# Altium PCB BMS.PcbDoc
Units mm, origin at the board's own origin, x right, y up, seen from the top; angles counter-clockwise.
Board outline 55.88 x 38.1 mm, 2 copper layers (Top Layer, Bottom Layer); 54 components, 35 nets, 178 pads, 4 vias.
Unrouted connection lines stored in the file: 59.
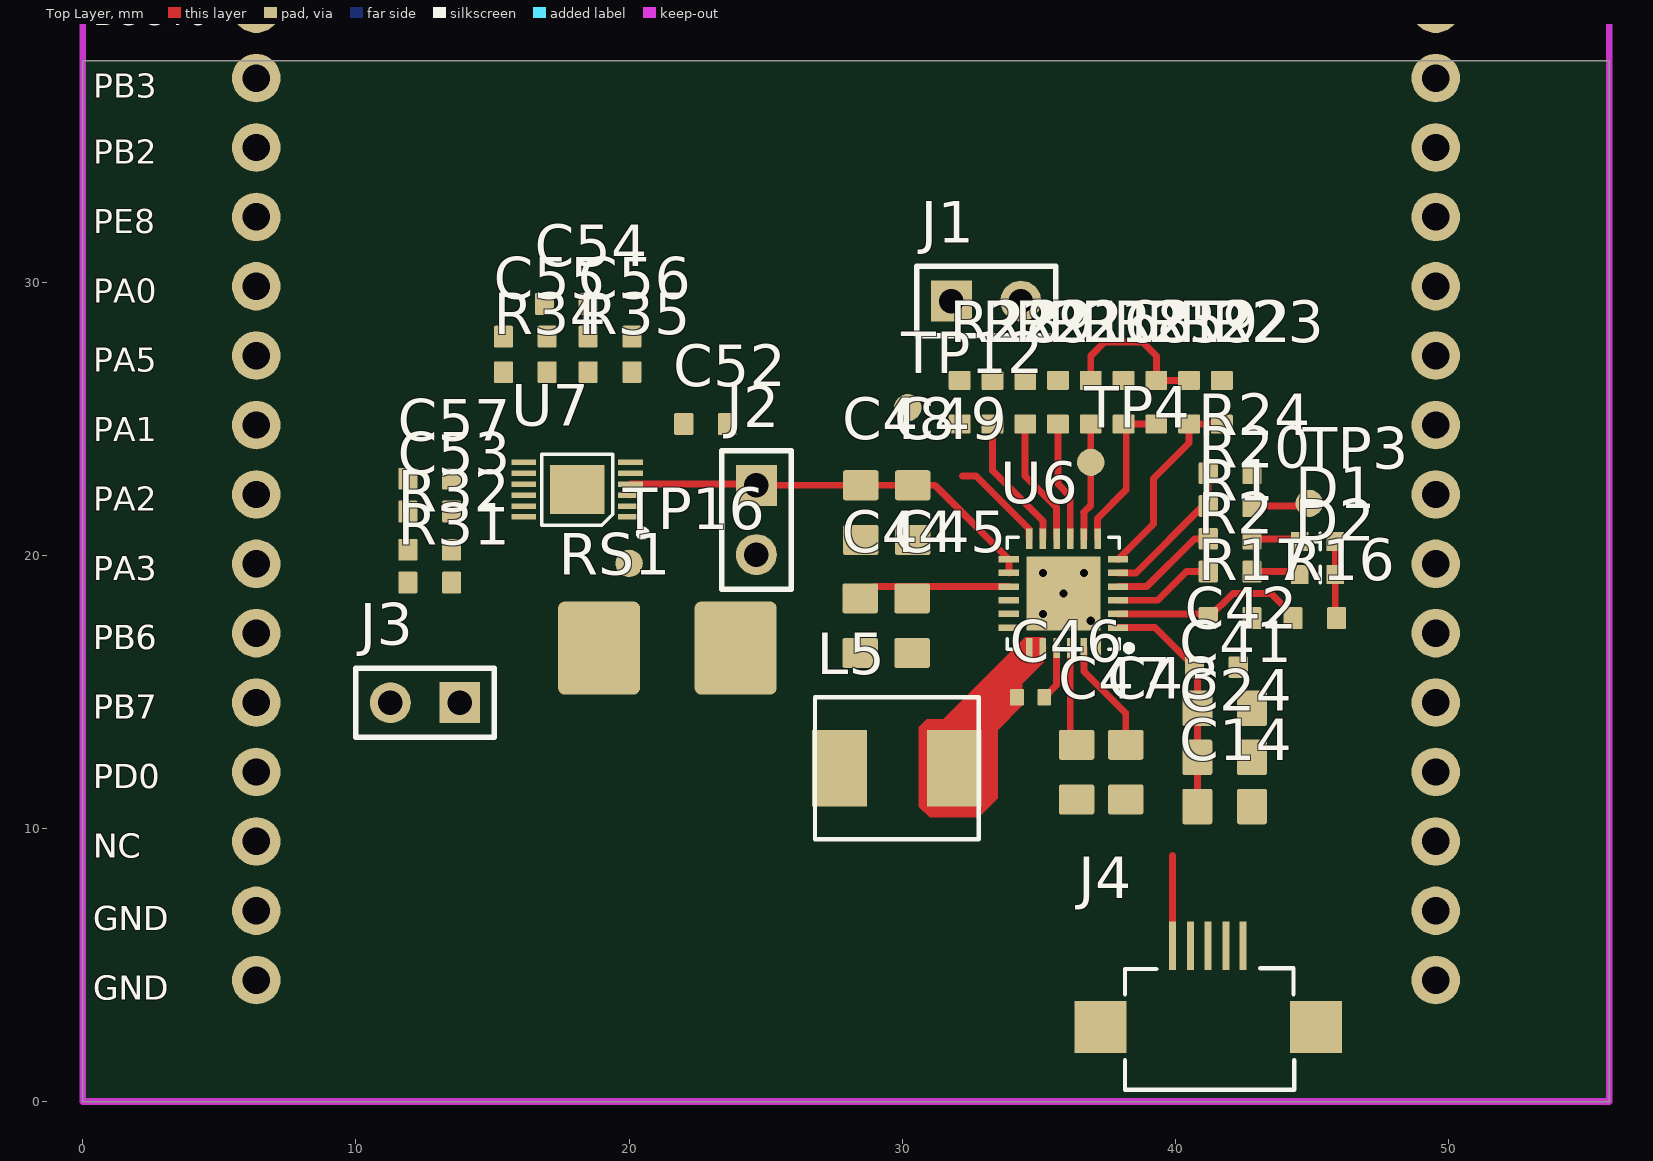
[diagram p0: Top Layer view]
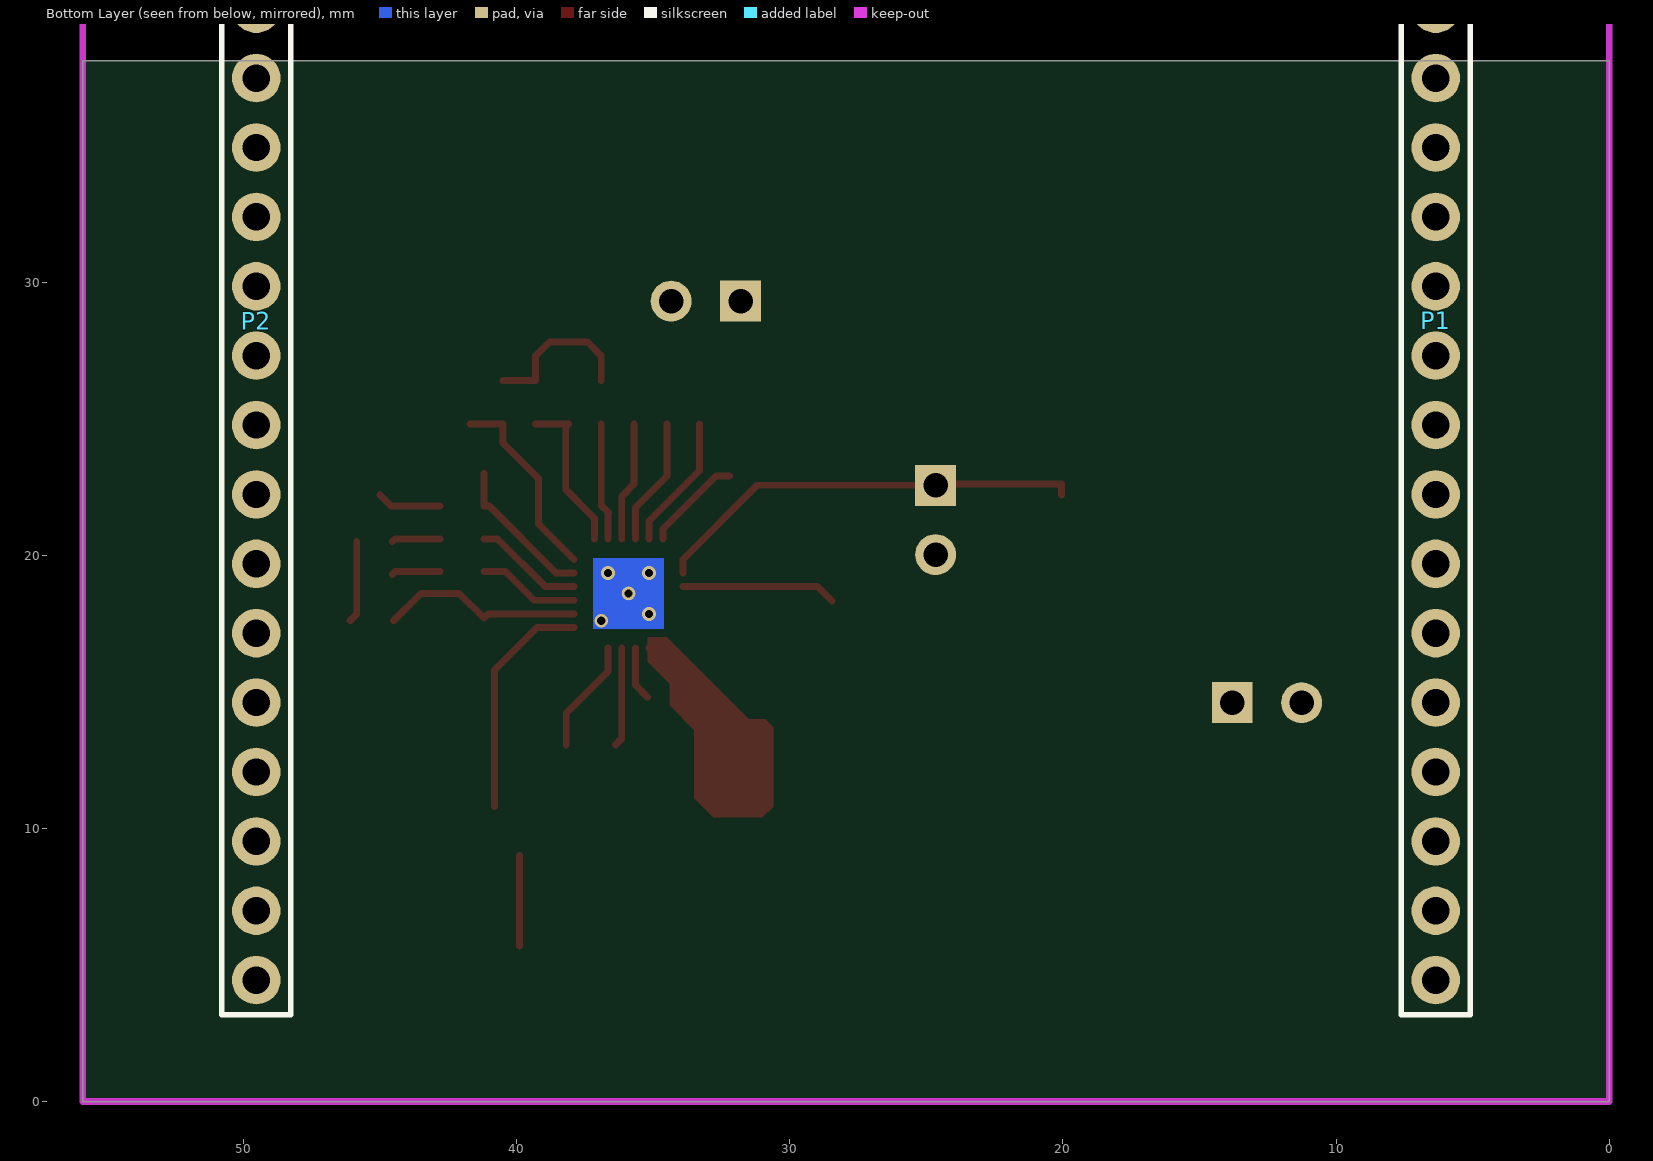
[diagram p1: Bottom Layer view, seen from below]

## Layer stack, top to bottom
Top Solder: solder mask 0.0102, Solder Resist, Dk 3.5
Top Layer: signal copper 0.0356
Dielectric 1: dielectric 0.32, FR-4, Dk 4.8
Bottom Layer: signal copper 0.0356
Bottom Solder: solder mask 0.0102, Solder Resist, Dk 3.5

## Board outline
0,0 55.88,0 55.88,38.1 0,38.1

## Design rules (kind name [scope] priority, off if disabled: settings)
Clearance [All] p1: gap=0.2 ignorepadtopadclearanceinfootprint=FALSE
PolygonConnect [All] p1: connectstyle=Relief reliefconductorwidth=0.254 reliefentries=4 polygonreliefangle="90 Angle" airgapwidth=0.254
RoutingVias [All] p1: holewidth=0.711 width=1.27 viastyle="Through Hole" minholewidth=0.711 minwidth=1.27 maxholewidth=0.711 maxwidth=1.27
SolderMaskExpansion [All] p1: expansion=0.102
Width [All] p1: maxlimit=0.254 minlimit=0.254 preferedwidth=0.254
30 further rules are at their usual default settings.

## Components (designator, comment, footprint, x,y, rotation, side; value= is the part's Value field where it differs from the comment)
C14 "TMK212BBJ106KG-T" C0805 41.8,10.8 r180 top
C24 "TMK212BBJ106KG-T" C0805 41.8,12.6 r180 top
C41 "TMK212BBJ106KG-T" C0805 41.8,14.4 r180 top
C42 "0603B104K500CT" C0603 41.5,15.9 r180 top
C43 "TMK212BBJ106KG-T" C0805 38.18,12.06 r90 top
C44 "TMK212BBJ106KG-T" C0805 28.46,17.42 r90 top
C45 "TMK212BBJ106KG-T" C0805 30.36,17.42 r90 top
C46 "GRM155R71C473KA01D" C0402 34.7,14.8 r180 top
C47 "TMK212BBJ106KG-T" C0805 36.38,12.06 r90 top
C48 "TMK212BBJ106KG-T" C0805 28.48,21.56 r90 top
C49 "TMK212BBJ106KG-T" C0805 30.38,21.56 r90 top
C52 "CL10A475KQ8NNNC" C0603 22.8,24.8 r0 top
C53 "0603B104K500CT" C0603 12.7,21.6 r0 top
C54 "0603B104K500CT" C0603 17.7,29.2 r180 top
C55 "0603B104K500CT" C0603 16.2,28 r180 top
C56 "0603B104K500CT" C0603 19.3,28 r180 top
C57 "0603B104K500CT" C0603 12.7,22.8 r180 top
D1 "LED_WHITE_0603" LED_BLUE_0603_TOP 45.2,20.5 r180 top
D2 "LED_BLUE_0603" LED_BLUE_0603_TOP 45.2,19.3 r180 top
J1 "HDR1x2" HDR1x2 31.8,29.3 r0 top
J2 "HDR1x2" HDR1x2 24.66,22.56 r270 top
J3 "HDR1x2" HDR1x2 13.8,14.6 r180 top
J4 "microUSB" MICRO_USB_SMD 41.2,5.7 r180 top
L5 "SRP5020TA-2R2M" SRP5020TA 29.8,12.2 r180 top
P1 "Comment" "HDR1X20 (Primary)" 6.35,52.705 r270 bottom
P2 "Comment" "HDR1X20 (Primary)" 49.53,52.705 r270 bottom
R1 "WR06X222 JTL" R0603 42,20.6 r0 top
R2 "WR06X222 JTL" R0603 42,19.4 r0 top
R16 "WR06X000 PTL" R0603 45.1,17.7 r180 top
R17 "WR06X000 PTL" R0603 42,17.7 r0 top
R18 "WR06X103 JTL" R0603 36.9,25.6 r270 top
R19 "WR06X103 JTL" R0603 39.3,25.6 r270 top
R20 "WR06X103 JTL" R0603 42,21.8 r180 top
R21 "RC0603FR-07100RL" R0603 34.5,25.6 r90 top
R22 "WR06X103 JTL" R0603 40.5,25.6 r270 top
R23 "WR06X000 PTL" R0603 41.7,25.6 r90 top
R24 "WR06X000 PTL" R0603 42,23 r0 top
R25 "WR06X000 PTL" R0603 38.1,25.6 r90 top
R26 "WR06X000 PTL" R0603 35.7,25.6 r270 top
R28 "WR06X103 JTL" R0603 32.1,25.6 r270 top
R29 "WR06X103 JTL" R0603 33.3,25.6 r90 top
R31 "WR06X000 PTL" R0603 12.7,19 r0 top
R32 "WR06X000 PTL" R0603 12.7,20.2 r0 top
R34 "RC0603FR-0749R9L" R0603 16.2,26.7 r180 top
R35 "RC0603FR-0749R9L" R0603 19.3,26.7 r0 top
RS1 "PA2512FKF7W0R001E" R2512L 21.4,16.6 r180 top
TP3 "TestPoint" TESTPOINT 44.9,21.9 r90 top
TP4 "TestPoint" TESTPOINT 36.9,23.4 r0 top
TP9 "TestPoint" TESTPOINT 151.34,22.44 r90 top
TP12 "TestPoint" TESTPOINT 30.2,25.4 r270 top
TP15 "TestPoint" TESTPOINT 98,22.44 r90 top
TP16 "TestPoint" TESTPOINT 20,19.7 r90 top
U6 "BQ25892" QFN24-4x4x0.8-0.5 35.9,18.6 r180 top
U7 "BQ27542-G1" BQ27542DRZR-G1 18.1,22.4 r180 top

## Footprints (in the part's own frame and the unit in brackets; to place one, negate y for a bottom-side part, rotate by r counter-clockwise, add the part's x,y. Pads: shape width x height; smd on the part's side, far side on the other; paste and mask are expansions set on the pad)
BQ27542DRZR-G1 [mm]
  rect 0.9x0.2 smd: 1(-1.95,1) 2(-1.95,0.6) 3(-1.95,0.2) 4(-1.95,-0.2) 5(-1.95,-0.6) 6(-1.95,-1) 7(1.95,-1) 8(1.95,-0.6) 9(1.95,-0.2) 10(1.95,0.2) 11(1.95,0.6) 12(1.95,1)
  rect 2x1.8 smd paste-0.2: 13(0,0)
  silkscreen extent -2.53,-1.3 1.3,1.72, body extent -2.05,-1.25 2.05,1.25, height 1
C0402 [mm] "CAP 0402 SMT 1x0.5x0.5 mm"
  rrect15% 0.5x0.6 smd paste-2 mask+0: 1(-0.5,0) 2(0.5,0)
  body extent -0.5,-0.25 0.5,0.25, height 0.56
C0603 [mm] "CAP 0603 SMT 1.6x0.8x0.8mm"
  rrect15% 0.7x0.8 smd paste-3 mask+0: 1(-0.8,0) 2(0.8,0)
  body extent -0.8,-0.4 0.8,0.4, height 0.8
C0805 [mm]
  rrect15% 1.1x1.3 smd paste-3 mask+0: 1(-1,0) 2(1,0)
  body extent -1,-0.63 1,0.62, height 1.25
HDR1x2 [mm] "Connector; Header; 2 Position"
  rect 1.5x1.5 hole 0.9: 1(0,0)
  round 1.5 hole 0.9: 2(2.54,0)
  silkscreen extent -1.27,-1.27 3.81,1.27
"HDR1X20 (Primary)" [mil]
  rect 70x70 hole 39.37 paste+0 mask+3.94: 1(0,0)
  round 70 hole 39.37 paste+0 mask+3.94: 2(100,0) 3(200,0) 4(300,0) 5(400,0) 6(500,0) 7(600,0) 8(700,0) 9(800,0) 10(900,0) 11(1000,0) 12(1100,0) 13(1200,0) 14(1300,0) 15(1400,0) 16(1500,0) 17(1600,0) 18(1700,0) 19(1800,0) 20(1900,0)
  silkscreen extent -55,-50 1950,50
LED_BLUE_0603_TOP [mm]
  rect 0.65x0.7 smd: 1(-0.65,0) 2(0.65,0)
  silkscreen extent -0.1,-0.3 0.1,0.3, body extent -0.8,-0.4 0.8,0.4, height 0.4
MICRO_USB_SMD [mil]
  rect 10x70 smd: 1(51.18,0) 2(25.59,0) 3(0,0) 4(-25.59,0) 5(-50,0)
  rect 74.8x74.8 smd: 6(-155.51,116.84) 6(155.51,116.84)
  silkscreen extent -124,32 120,207, body extent -157,5 158,218, height 109
QFN24-4x4x0.8-0.5 [mm] "QFN24 pin 4x4mm pitch 0.5mm"
  rect 0.74x0.24 smd mask+0.051: 1(-2,1.25) 2(-2,0.75) 3(-2,0.25) 4(-2,-0.25) 5(-2,-0.75) 6(-2,-1.25) 13(2,-1.25) 14(2,-0.75) 15(2,-0.25) 16(2,0.25) 17(2,0.75) 18(2,1.25)
  rect 0.24x0.74 smd mask+0.051: 7(-1.25,-2) 8(-0.75,-2) 9(-0.25,-2) 10(0.25,-2) 11(0.75,-2) 12(1.25,-2) 19(1.25,2) 20(0.75,2) 21(0.25,2) 22(-0.25,2) 23(-0.75,2) 24(-1.25,2)
  rect 2.7x2.7 smd paste-10 mask+0: 25(0,0)
  round 0.5 hole 0.3: 25(0,0)
  Bottom Layer region: -1.3,-1.3 1.3,-1.3 1.3,1.3 -1.3,1.3
  silkscreen extent -2.5,-2.05 2.05,2.1, body extent -2,-2 2,2, height 1
R0603 [mm] "Chip Resistor, 2-Leads, Body 1.6x0.8mm"
  rrect15% 0.7x0.8 smd paste-3 mask+0: 1(-0.8,0) 2(0.8,0)
  Top Layer pour cut-out: -0.4,0.5 0.4,0.5 0.4,-0.5 -0.4,-0.5
  body extent -0.8,-0.41 0.8,0.41, height 0.45
R2512L [mm] "Chip Resistor, 2-Leads, Body 6.45x3.35mm"
  rrect15% 3x3.4 smd mask+0: 1(-2.5,0) 2(2.5,0)
  body extent -3.16,-1.6 3.16,1.6, height 0.62
SRP5020TA [mm]
  rect 2x2.8 smd: 1(-2.1,0) 2(2.1,0)
  silkscreen extent -3,-2.6 3,2.6, body extent -2.85,-2.6 2.85,2.6, height 1.81
TESTPOINT [mm] "TestPoint"
  round 1 smd paste-10 mask+0: 1(0,0)
  body extent -0.5,-0.5 0.5,0.5, height 0.3

## Part data
C14 C24 C41 C43 C44 C45 C47 C48 C49: library part CAP_10uF_0805, "CAP, CERM, 10uF, 25V, +/-10%, X5R, 0402", Capacitance=10uF, Manufacturer="Taiyo Yuden", Manufacturer Device Package=0805, Operating voltage=25V, Alias=CAP_10uF_0805, Lumi PART=CAP_10uF_0805, Manufacturer Part Number=TMK212BBJ106KG-T, Price=0.035, Size / Dimension="2.0mm x 1.25mm x 1.25mm"
C42 C53 C54 C55 C56 C57: library part CERM_0.1uF_0603, "CAP, CERM, 0.1uF, 50V, +/-10%, X7R, 0603", Capacitance=0.1uF, Manufacturer=Walsin, Manufacturer Device Package="0603 (1608 Metric)", Operating voltage=50V, Alias=CAP_0.1uF_0603, Lumi PART=CAP_104_0603, Manufacturer Part Number=0603B104K500CT, Size / Dimension="1.60mm x 0.80mm x 0.8mm"
C46: library part CAP_47nF_0402, "CAP, CERM, 47nF, 16V, +/-10%, X7R, 0402", Capacitance=47nF, Manufacturer=Murata, Manufacturer Device Package=0402, Operating voltage=16V, Alias=CAP_47nF_0402, Lumi PART=CAP_47nF_0402, Manufacturer Part Number=GRM155R71C473KA01D, Price=0.012, Size / Dimension="1.0mm x 0.5mm x 0.5mm"
C52: library part CAP_4.7uF_0603, "CAP, CERM, 4.7uF, 6.3V, +/-10%, X5R, 0603", Capacitance=4.7uF, Manufacturer="Samsung Electro-Mechanics", Manufacturer Device Package=0603, Operating voltage=6.3V, Alias=CAP_4.7uF_0603, Lumi PART=CAP_4.7uF_0603, Manufacturer Part Number=CL10A475KQ8NNNC, Price=0.012, Size / Dimension="1.6mm x 0.8mm x 0.8mm"
D1: "LED, Mono Colour, WHITE, Top View, SMD 0603", Forward Voltage=3.1V, Manufacturer=Everlight, Manufacturer Device Package="0603 (1608 Metric)", Manufacturer Part Number=19-218/T1D-CQ2R2TY/3T, Max. operating voltage=3V, Alias=LED_WHITE_0603, Lumi PART=LED_WHITE_0603, Size / Dimension="2.0mm x 1.60mm"
D2: "LED, Mono Colour, BLUE, Top View, SMD 0603", Forward Voltage=3.1V, Manufacturer=Everlight, Manufacturer Device Package="0603 (1608 Metric)", Manufacturer Part Number=19-217/BHC-ZL1M2RY/3T, Max. operating voltage=3V, Alias=LED_BLUE_0603, Lumi PART=LED_BLUE_0603, Size / Dimension="2.0mm x 1.60mm"
J1 J2 J3: "Header 1x2 2.54mm"
J4: "USB - micro B USB 2.0 Receptacle Connector 5 Position Surface Mount, Right Angle, Horizontal", Manufacturer="Amphenol FCI", Manufacturer Part Number=10118194-0001LF, Supplier Part Number 1=609-4618-2-ND, Category="Connectors, Interconnects", ComponentLink1Description=http://portal.fciconnect.com/Comergent//fci/drawing/10118194.pdf, ComponentLink1URL=http://portal.fciconnect.com/Comergent//fci/drawing/10118194.pdf, Connector Type="USB - micro B", Features="Shielded, Solder Retention", Gender=Receptacle, Ingress Protection=-, Mounting Type="Surface Mount, Right Angle, Horizontal", Number of Contacts=5, Packaging="Tape & Reel (TR)", Part Status=Active, Pricing 1="1200=0.19845, 2400=0.18144, 6000=0.1701, 8400=0.15876, 12000=0.15309, 30000=0.15082, 60000=0.14742 (USD)", RoHS="RoHS Compliant", Specifications="USB 2.0", Stock 1=159600, Supplier 1=Digi-Key
L5: "IND,5.7X5.2X1.8MM,2.2UH20%,4.2A", DC Current=4.2A, Inductance=2.2uH, Manufacturer=Bourns, Manufacturer Device Package=5.7X5.2X1.8MM, Alias=SRP5020TA-2R2M, Lumi PART=SRP5020TA-2R2M, Manufacturer Part Number=SRP5020TA-2R2M, Size / Dimension=5.7X5.2X1.8MM
P1 P2: library part HDR1X20
R1 R2: library part RES_2.2K_0603, "RES, SMD, ThickFilm, 2.2K, 1/10W, 5%, 0603", Manufacturer=Walsin, Manufacturer Device Package="0603 (1608 Metric)", Power (Watts)="0.1W, 1/10W", Resistance (Ohms)=2.2K, Alias=RES_2.2K_0603, Lumi PART=RES_2.2K_0603, Manufacturer Part Number="WR06X222 JTL", Size / Dimension="1.60mm x 0.80mm x 0.45mm"
R16 R17 R23 R24 R25 R26 R31 R32: library part RES_0R_0603, "RES, SMD, ThickFilm, 0R, JUMPER, 0603", Manufacturer=Walsin, Manufacturer Device Package="0603 (1608 Metric)", Power (Watts)="0.1W, 1/10W", Resistance (Ohms)=0R, Alias=RES_0R_0603, Lumi PART=RES_0R_0603, Manufacturer Part Number="WR06X000 PTL", Size / Dimension="1.60mm x 0.80mm x 0.45mm"
R18 R19 R20 R22 R28 R29: library part RES_10K_0603, "RES, SMD, ThickFilm, 10K, 1/10W, 5%, 0603", Manufacturer=Walsin, Manufacturer Device Package="0603 (1608 Metric)", Power (Watts)="0.1W, 1/10W", Resistance (Ohms)=10K, Alias=RES_10K_0603, Lumi PART=RES_10K_0603, Manufacturer Part Number="WR06X103 JTL", Size / Dimension="1.60mm x 0.80mm x 0.45mm"
R21: library part RES_100R_0603, "RES, SMD, ThickFilm, 100R, 1/10W, 1%, 0603", Manufacturer=Yageo, Manufacturer Device Package="0603 (1608 Metric)", Power (Watts)="0.1W, 1/10W", Resistance (Ohms)=100R, Alias=RES_100R_0603, Lumi PART=RES_100R_0603, Manufacturer Part Number=RC0603FR-07100RL, Size / Dimension="1.60mm x 0.80mm x 0.45mm"
R34 R35: library part RES_49R9_0603, "RES, SMD, ThickFilm, 49R9, 1/10W, 1%, 0603", Manufacturer=Yageo, Manufacturer Device Package="0603 (1608 Metric)", Power (Watts)="0.1W, 1/10W", Resistance (Ohms)=49R9, Alias=RES_49R9_0603, Lumi PART=RES_49R9_0603, Manufacturer Part Number=RC0603FR-0749R9L, Size / Dimension="1.60mm x 0.80mm x 0.45mm"
RS1: library part RES_1mR_2512, "RES, SMD, Current Sense Resistors, 1mOhms, 2W, 1%, 2512", Manufacturer=Yageo, Manufacturer Device Package=2512, Power (Watts)=2W, Resistance (Ohms)=10mR, Alias=RES_1mR_2512, Lumi PART=RES_1mR_2512, Manufacturer Part Number=PA2512FKF7W0R001E, Price=0.15, Size / Dimension="6.3mm x 3.2mm x 0.6mm"
TP3 TP4 TP9 TP12 TP15 TP16: Manufacture=LUMI, Alias=TestPoint, Component Type="NO BOM", Dielectric=TestPoint, Dimension=1mm*1mm, Part=TestPoint, Part Number=TestPoint, Published=2016/07/01, Publisher=LUMIVN
U6: "1S 5A Fast Charger MaxCharge", Manufacturer="Texas Instruments", Manufacturer Part Number=BQ25892RTWT, Max Charge Current=5A, Max Operating Temperature=85°C, Max Supply Voltage=14V, Min Operating Temperature=-40°C, Output Voltage=4.6V, Supplier Part Number 1=296-41131-1-ND, ComponentLink1Description=http://www.ti.com/lit/pdf/sluubb8?src-supplier=Digi-Key, ComponentLink1URL=http://www.ti.com/lit/pdf/sluubb8?src-supplier=Digi-Key, ComponentLink2Description=http://www.ti.com/lit/ds/symlink/bq25890.pdf?src-supplier=Digi-Key, ComponentLink2URL=http://www.ti.com/lit/ds/symlink/bq25890.pdf?src-supplier=Digi-Key, ComponentLink3Description=http://www.ti.com/general/docs/lit/getliterature.tsp?genericPartNumber=BQ25892&&fileType=pdf&src-supplier=Element14, ComponentLink3URL=http://www.ti.com/general/docs/lit/getliterature.tsp?genericPartNumber=BQ25892&&fileType=pdf&src-supplier=Element14, ComponentLink4Description=http://www.ti.com/lit/ds/symlink/bq25892.pdf?src-supplier=Avnet, ComponentLink4URL=http://www.ti.com/lit/ds/symlink/bq25892.pdf?src-supplier=Avnet, ComponentLink5Description=http://www.ti.com/general/docs/lit/getliterature.tsp?genericPartNumber=BQ25892&amp;&amp;fileType=pdf&src-supplier=Farnell, ComponentLink5URL=http://www.ti.com/general/docs/lit/getliterature.tsp?genericPartNumber=BQ25892&amp;&amp;fileType=pdf&src-supplier=Farnell, ComponentLink6Description=http://www.ti.com/general/docs/lit/getliterature.tsp?genericPartNumber=BQ25892&&fileType=pdf&src-supplier=Farnell, ComponentLink6URL=http://www.ti.com/general/docs/lit/getliterature.tsp?genericPartNumber=BQ25892&&fileType=pdf&src-supplier=Farnell, Contact Plating=Gold, Fault Protection="Over Current,Over Temperature", Interface=I2C,USB, Lead Free="Lead Free", Mount="Surface Mount", Number of Cells=1, Number of Pins=24, Output Current=5A, Packaging="Cut Tape", Pricing 1="1 = 4.14000, 10 = 3.72100, 100 = 2.89250 (USD)", REACH SVHC="No SVHC", RoHS=Yes, Stock 1=460, Supplier 1=Digi-Key
U7: Capacity=16000mAh, Manufacturer="Texas Instruments", Manufacturer Part Number=BQ27541DRZR-G1, Max Operating Temperature=85°C, Max Supply Voltage=5.5V, Min Operating Temperature=-40°C, Min Supply Voltage=2.7V, Package Quantity=3000, Supplier Part Number 1=296-34998-1-ND, ComponentLink1Description=https://datasheet.ciiva.com/24097/slusal6c-261693-24097200.pdf?src-supplier=Mouser, ComponentLink1URL=https://datasheet.ciiva.com/24097/slusal6c-261693-24097200.pdf?src-supplier=Mouser, ComponentLink2Description=https://datasheet.ciiva.com/6613/bq27541-g1-6613718.pdf?src-supplier=Digi-Key, ComponentLink2URL=https://datasheet.ciiva.com/6613/bq27541-g1-6613718.pdf?src-supplier=Digi-Key, ComponentLink3Description=https://datasheet.ciiva.com/6613/bq27541-g1-6613717.pdf?src-supplier=Digi-Key, ComponentLink3URL=https://datasheet.ciiva.com/6613/bq27541-g1-6613717.pdf?src-supplier=Digi-Key, ComponentLink4Description=https://datasheet.ciiva.com/28425/bq27541-g1-28425989.pdf?src-supplier=Avnet+Europe, ComponentLink4URL=https://datasheet.ciiva.com/28425/bq27541-g1-28425989.pdf?src-supplier=Avnet+Europe, ComponentLink5Description=http://www.ti.com/lit/pdf/sluub65?src-supplier=Digi-Key, ComponentLink5URL=http://www.ti.com/lit/pdf/sluub65?src-supplier=Digi-Key, ComponentLink6Description=http://www.ti.com/general/docs/lit/getliterature.tsp?genericPartNumber=BQ27542-G1&amp;&amp;fileType=pdf&src-supplier=Avnet+Asia, ComponentLink6URL=http://www.ti.com/general/docs/lit/getliterature.tsp?genericPartNumber=BQ27542-G1&amp;&amp;fileType=pdf&src-supplier=Avnet+Asia, ComponentLink7Description=http://www.ti.com/lit/gpn/bq27542-g1?src-supplier=Mouser, ComponentLink7URL=http://www.ti.com/lit/gpn/bq27542-g1?src-supplier=Mouser, ComponentLink8Description=http://www.ti.com/general/docs/lit/getliterature.tsp?genericPartNumber=BQ27542-G1&&fileType=pdf&src-supplier=Avnet, ComponentLink8URL=http://www.ti.com/general/docs/lit/getliterature.tsp?genericPartNumber=BQ27542-G1&&fileType=pdf&src-supplier=Avnet, ComponentLink9Description=http://www.ti.com/lit/ds/symlink/bq27542-g1.pdf?src-supplier=Digi-Key, ComponentLink9URL=http://www.ti.com/lit/ds/symlink/bq27542-g1.pdf?src-supplier=Digi-Key, Contact Plating=Gold, Interface=I2C, Lead Free="Lead Free", Mount="Surface Mount", Number of Pins=12, Operating Supply Voltage=5.5V, Packaging="Tape and Reel", Pricing 1="1 = 3.57000, 10 = 3.20900, 100 = 2.49430, 500 = 2.15724, 1000 = 1.79320 (USD)", Pricing 2="1 = 2.69000, 10 = 2.41700, 100 = 1.87880, 500 = 1.62492, 1000 = 1.35072 (USD)", Radiation Hardening=No, REACH SVHC="No SVHC", RoHS=Yes, Stock 1=9527, Stock 2=16878, Supplier 1=Digi-Key, Supplier 2=Digi-Key, Supplier Part Number 2=296-44346-1-ND

## Via types
v1: diameter 0.5, hole 0.3, Top Layer to Bottom Layer, 4 vias

## Nets (pads, with @x,y where several pads share a name; then routed paths per layer and width w, separated by ;. In a path a pad name is that pad's centre, name@x,y a point inside that pad or via, vN(x,y) a via of type N, cw(c..) or ccw(c..) an arc to the next point about the centre after c; other vN are vias at no path point)
BQ_BST: C46.1 U6.21 | length 2
  Top Layer w0.254: C46.1 35.65,15.25 U6.21
BQ_I2C_SCL: R20.2 R24.1 U6.5 | length 5.5
  Top Layer w0.254: U6.5 38.55,19.35 41,21.8 R20.2 R24.1
BQ_I2C_SDA: R22.2 R23.1 U6.6 | length 7.2
  Top Layer w0.254: U6.6 39.2,21.15 39.2,22.8 40.5,24.1 R22.2 R23.1
BQ_ILIM: R21.1 U6.10 | length 4.7
  Top Layer w0.254: R21.1 34.5,22.9 35.65,21.75 U6.10
BQ_INT: P1.14 R25.2
BQ_INT_L: R19.2 R25.1 U6.7 | length 5.9
  Top Layer w0.254: U6.7 37.15,21.35 38.2,22.4 38.2,24.7 R25.1 R19.2
BQ_nCE: R26.2 U6.9 | length 4.4
  Top Layer w0.254: R26.2 35.7,22.6 36.15,22.15 U6.9
BQ_nPG: R2.1 U6.3 | length 3.7
  Top Layer w0.254: U6.3 39.35,18.35 40.4,19.4 R2.1
BQ_OTG: R18.2 TP4.1 U6.8 | length 4.3
  Top Layer w0.254: U6.8 36.65,21.552 36.642,21.56 36.9,21.818 TP4.1 R18.2
BQ_PMID: C43.2 U6.23 | length 4.2
  Top Layer w0.254: U6.23 36.65,15.75 38.18,14.22 C43.2
BQ_PSEL: R16.2 R17.1 U6.2 | length 7.4
  Top Layer w0.254: U6.2 41.05,17.85 R17.1 42.1,18.6 43.5,18.6 R16.2@44.5,17.6
BQ_QON: TP12.1 U6.12 | length 3.6
  Top Layer w0.254: 32.2,22.9 32.7,22.9 34.642,20.958 U6.12@34.642,20.6
BQ_STAT: R1.1 U6.4 | length 4
  Top Layer w0.254: U6.4 38.95,18.85 40.7,20.6 R1.1
BQ_SW: C46.2 L5.1 U6.19 U6.20 | length 5.9
  Top Layer w0.254: L5.1@32.18,12.26 32.18,12.48 34,14.3 34,14.8 34,15.95 U6.19 U6.20
BQ_TS: J1.1 R28.2 R29.1 U6.11 | length 5
  Top Layer w0.254: R29.1 33.3,23.1 35.15,21.25 U6.11
G_BAT: C52.1 C57.1 J2.2 R35.1 RS1.2 U7.6 U7.13
GND: C14.1 C24.1 C41.1 C42.1 C43.1 C44.1 C45.1 C47.1 C48.1 C49.1 J1.2 J4.5 R17.2 R21.2 R26.1 R29.2 R34.1 RS1.1 U6.17 U6.18 U6.25
  other v1: 36.9,17.6 35.15,17.85 35.15,19.35 36.65,19.35
NetC54_1: C54.1 C56.1 R35.2 U7.7
NetC54_2: C54.2 C55.2 R34.2 U7.8
NetC55_1: C55.1 C56.2
NetD1_2: D1.2 R1.2 | length 1.8
  Top Layer w0.254: R1.2 44.45,20.6 D1.2
NetD2_2: D2.2 R2.2 | length 1.8
  Top Layer w0.254: R2.2 44.45,19.4 D2.2
NetR31_2: R31.2 U7.11
NetR32_2: R32.2 U7.10
NetTP15_1: TP15.1 U7.12
NetTP16_1: TP16.1 U7.1
REG25: C52.2 C53.1 C57.2 J3.2 U7.2 U7.5
REGN: C47.2 R28.1 U6.22 | length 3.6
  Top Layer w0.254: U6.22 36.15,13.29 C47.2
SS_I2C_SCL: P1.15 R24.2 R31.1
SS_I2C_SDA: P1.16 R23.2 R32.1
TS: C53.2 J3.1 U7.9
V_BAT: C48.2 C49.2 J2.1 TP9.1 U6.13 U6.14 U7.3 U7.4 | length 15.9
  Top Layer w0.254: U7.3 U7.4 24.62,22.6 J2.1 C48.2 C49.2 31.19,22.56 U6.13 U6.14
V_SYS: C44.2 C45.2 D1.1 D2.1 L5.2 R16.1 U6.15 U6.16 | length 8.7
  Top Layer w0.254: C44.2@28.46,18.32 28.99,18.85 U6.15 ; D1.1 D2.1 45.85,17.85 R16.1@46.1,17.6
VCC_5V: C14.2 C24.2 C41.2 C42.2 J4.1 U6.1 | length 11.8
  Top Layer w0.254: U6.1 39.25,17.35 C42.2 40.8,15.8 C41.2 C24.2 C14.2 ; J4.1 39.9,9
VDD_EXT3P3: R18.1 R19.1 R20.1 R22.1 TP3.1 | length 8.2
  Top Layer w0.254: R18.1 36.9,27.3 37.4,27.8 38.8,27.8 39.3,27.3 R19.1 R22.1 ; R20.1 44.6,21.8 TP3.1@45,22.2
pads on no net: J4.2 J4.3 J4.4 J4.6 P1.1 P1.2 P1.3 P1.4 P1.5 P1.6 P1.7 P1.8 P1.9 P1.10 P1.11 P1.12 P1.13 P1.17 P1.18 P1.19 P1.20 P2.1 P2.2 P2.3 P2.4 P2.5 P2.6 P2.7 P2.8 P2.9 P2.10 P2.11 P2.12 P2.13 P2.14 P2.15 P2.16 P2.17 P2.18 P2.19 P2.20 U6.24

## Keep-outs
Keep-Out Layer:
  lines w0.25: 55.88,120.015 55.88,0 ; 0,0 0,120.015 0,0 ; 0,0 55.88,0 ; 0,0 55.88,0 ; 0,0 55.88,0

## Other copper
Top Layer:
  region net BQ_SW: 35.2,16.1 34.4,15.3 34.4,14.5 33.5,13.6 33.5,11.1 32.8,10.4 31,10.4 30.6,10.8 30.6,13.7 30.9,14 31.5,14 33.4,15.9 34.5,17 35.2,17

## Silkscreen, mask and mechanical layers (free items; w line width, h text height)
Top Overlay:
  text "3V" at 0.381,41.656 h1.5
  text "BOOT0" at 0.381,39.116 h1.5
  text "PB3" at 0.381,36.449 h1.5
  text "PB2" at 0.381,34.036 h1.5
  text "PE8" at 0.381,31.496 h1.5
  text "PA0" at 0.381,28.956 h1.5
  text "PA5" at 0.381,26.416 h1.5
  text "PA1" at 0.381,23.876 h1.5
  text "PA2" at 0.381,21.336 h1.5
  text "PA3" at 0.381,18.796 h1.5
  text "PA3" at 0.381,18.796 h1.5
  text "PB6" at 0.381,16.256 h1.5
  text "PB6" at 0.381,16.256 h1.5
  text "PB6" at 0.381,16.256 h1.5
  text "PB7" at 0.381,13.716 h1.5
  text "PB7" at 0.381,13.716 h1.5
  text "PB7" at 0.381,13.716 h1.5
  text "PD0" at 0.381,11.176 h1.5
  text "PD0" at 0.381,11.176 h1.5
  text "PD0" at 0.381,11.176 h1.5
  text "NC" at 0.381,8.636 h1.5
  text "NC" at 0.381,8.636 h1.5
  text "NC" at 0.381,8.636 h1.5
  text "GND" at 0.381,5.969 h1.5
  text "GND" at 0.381,5.969 h1.5
  text "GND" at 0.381,5.969 h1.5
  text "GND" at 0.381,3.429 h1.5
  text "GND" at 0.381,3.429 h1.5
  text "GND" at 0.381,3.429 h1.5
Mechanical 1:
  the board outline again, w0.635

## Dimensions
0,120.015 to 0,0 on Mechanical 1
0,120.015 to 0,0 on Mechanical 1